# EAGLE board FuenteProtoLarga_v11 (EAGLE 6.1)
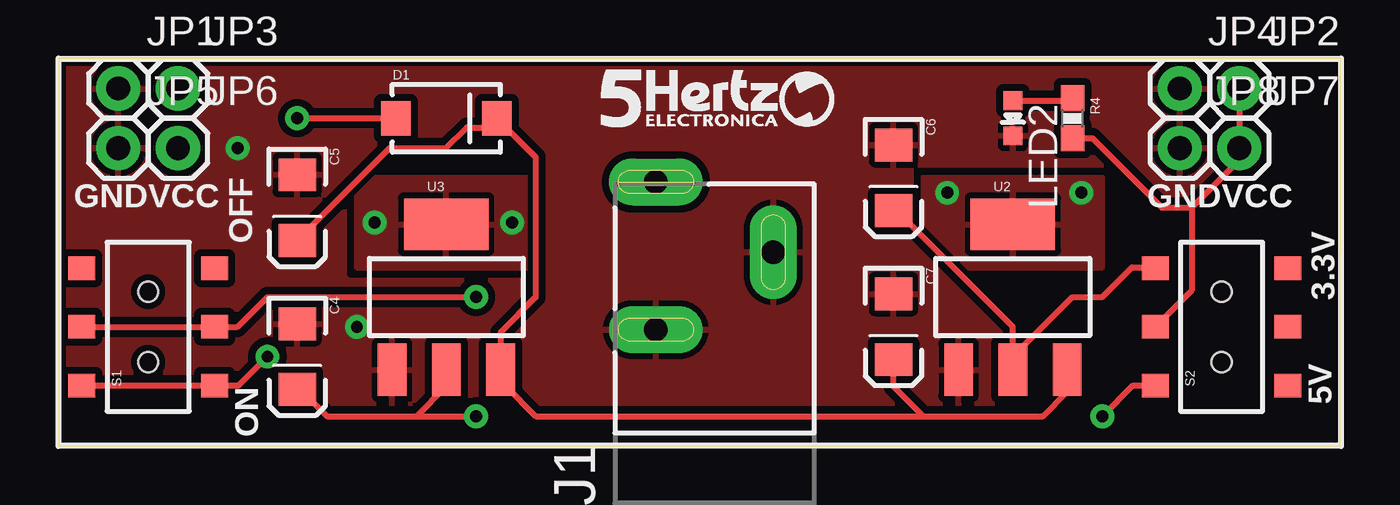
[diagram p0: board, top side]
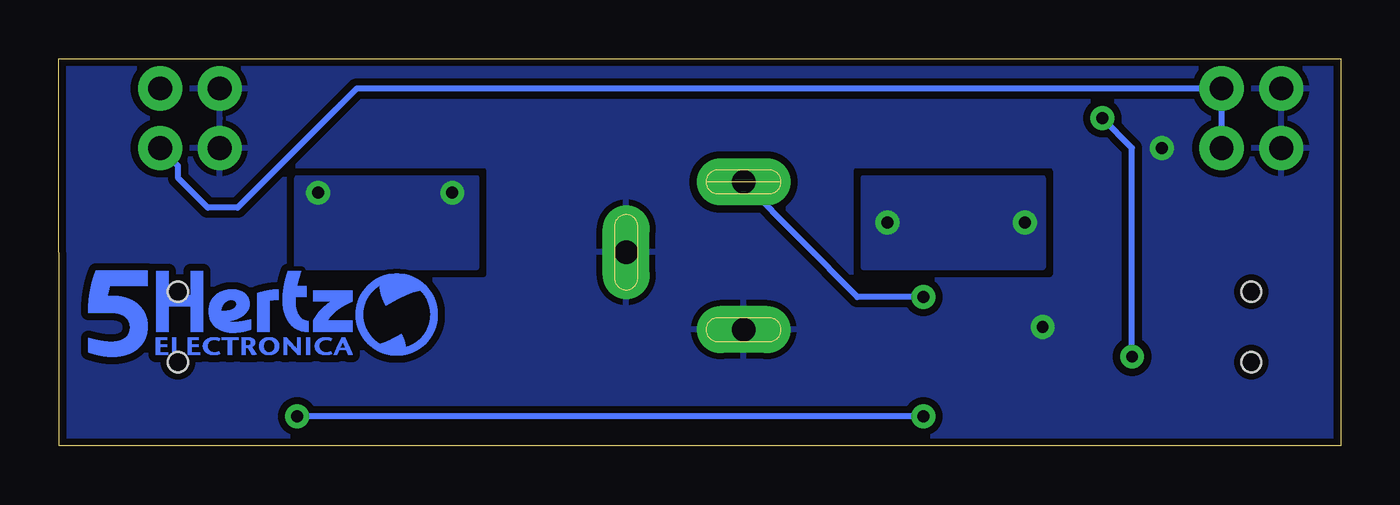
[diagram p1: board, bottom side, seen from below]

Size 54.61 x 16.51 mm. Coordinates in mm from the lower left corner, seen from the top.
Outline: 0,0 54.59,0 54.61,16.51 0,16.51 0,0
Copper layers (1*16): Top 0.035mm / dielectric 1.5mm / Bottom 0.035mm
Design rules: minimum track width 8mil, minimum drill 20mil, track to track 8mil, track to pad 8mil, pad to pad 8mil, via to via 8mil, smd to smd 8mil, copper to edge 10mil, drill to drill 8mil, minimum pad ring 12mil, minimum via ring 10mil, stop-mask expansion 4mil, vias tented up to drill 25mil, thermal gap 10mil
Net classes: 0 default: width 0.254 mm; 1 vcc: width 0.254 mm

## Footprints (pad centres in the part's own frame; a part is rotated, then mirrored left to right if it is on the bottom)
EIA3216 = smd 1.4 x 1.6: A 1.4,0; C -1.4,0
SMA-DIODE = smd 1.27 x 1.47: A -2.15,0; C 2.15,0
POWER_JACK_SLOT = drill 1 pad 2 long: GND@1 2.58,7.5; GND@2 7.58,10.8; PWR 2.58,13.8
1X01 = drill 1.016 pad 1.88: 1 0,0
LED-0603 = smd 0.8 x 0.8: A 0,-0.75; C 0,0.75
0603-RES = smd 1.1 x 1: 1 -0.85,0; 2 0.85,0
AYZ0202 = smd 1 x 1.15: 1 -2.5,2.825; 2 0,2.825; 3 2.5,2.825; 4 -2.5,-2.825; 5 0,-2.825; 6 2.5,-2.825 | hole 0.85: 1.5,0; -1.5,0
SOT223 = smd 1.219 x 2.235: 1 -2.311,-3.099; 2 0,-3.099; 3 2.311,-3.099 | smd 3.6 x 2.2: 4 0,3.099

## Placement (x,y rotation side)
C4  10uF  [EIA3216]  10.16,3.81 270 top
C5  10uF  [EIA3216]  10.16,10.16 270 top
C6  10uF  [EIA3216]  35.56,11.43 270 top
C7  10uF  [EIA3216]  35.56,5.08 270 top
D1  1N4001  [SMA-DIODE]  16.51,13.97 0 top
J1  POWER_JACKSLT  [POWER_JACK_SLOT]  22.86,-2.54 0 top
JP1  M01PTH  [1X01]  2.54,15.24 0 top
JP2  M01PTH  [1X01]  50.29,15.24 0 top
JP3  M01PTH  [1X01]  5.08,15.24 0 top
JP4  M01PTH  [1X01]  47.75,15.24 0 top
JP5  M01PTH  [1X01]  2.54,12.7 0 top
JP6  M01PTH  [1X01]  5.08,12.7 0 top
JP7  M01PTH  [1X01]  50.29,12.7 0 top
JP8  M01PTH  [1X01]  47.75,12.7 0 top
LED2  Power  [LED-0603]  40.64,13.97 180 top
LOGO1  LOGO_5HZ_H_10MM  [5HZ_LOGO_H_10MM]  23.11,13.59 0 top
LOGO2  LOGO_5HZ_H_COOPER_15MM  [5HZ_LOGO_H_COOPER_15MM]  53.34,3.81 0 bottom
R4  330  [0603-RES]  43.18,13.97 270 top
S1  On/Off  [AYZ0202]  3.81,5.08 90 top
S2  Voltage  [AYZ0202]  49.53,5.08 90 top
U2  V_REG_NCP1117SMD  [SOT223]  40.64,6.35 0 top
U3  V_REG_NCP1117SMD  [SOT223]  16.51,6.35 0 top

## Library data of the parts
C4-C7 D1 J1 JP1-JP8 R4 S1 S2 = SparkFun
LED2 = SparkFun-Nate
LOGO1 LOGO2 U2 U3 = 5hz-electronica

## Nets
3V3 [vcc]: C6.A S2.3 U2.2
5V [vcc]: C4.A S2.1 U3.2
DISIP: U3.4
DISIP2: U2.4
GND: C4.C C5.C C6.C C7.C J1.GND@1 J1.GND@2 JP1.1 JP4.1 JP5.1 JP8.1 LED2.C U2.1 U3.1
N$2: D1.A S1.1 S1.4
N$8: LED2.A R4.1
RAW: C5.A C7.A D1.C U2.3 U3.3
VCC: JP2.1 JP3.1 JP6.1 JP7.1 R4.2 S2.2
VIN: J1.PWR S1.2 S1.5

## Tracks (layer width: path | path; a pad name or v marks a point on that pad's centre or on a via)
3V3
  Top 0.254: U2.2 40.64,3.81 | 40.64,3.81 43.18,6.35 44.45,6.35 45.72,7.62 46.66,7.62 S2.3 | C6.A 35.69,10.03 40.64,5.08 40.64,3.81
5V  (via drill 0.51)
  Top 0.254: C4.A 10.29,2.41 11.43,1.27 15.24,1.27 | 15.24,1.27 16.51,2.54 U3.2 | S2.1 45.76,2.58 v44.45,1.27 | 15.24,1.27 v17.78,1.27
  Bottom 0.254: v17.78,1.27 v44.45,1.27
DISIP  (via drill 0.51)
  other vias: 13.46,9.53 19.3,9.53
  pour Top: 12.7,7.62 20.32,7.62 20.32,11.43 12.7,11.43
  pour Bottom: 12.7,11.43 12.7,7.62 20.32,7.62 20.32,11.43
DISIP2  (via drill 0.51)
  other vias: 37.85,10.79 43.56,10.79
  pour Top: 36.83,11.43 36.83,7.62 44.45,7.62 44.45,11.43
  pour Bottom: 36.83,11.43 36.83,7.62 44.45,7.62 44.45,11.43
GND  (via drill 0.51)
  other vias: 7.62,12.7 12.7,5.08
  pour Bottom (isolate 0.305, rank 2): 0,16.51 0,0 54.61,0 54.61,16.51
  pour Top (isolate 0.305, rank 2): 0,16.51 0,0 54.61,0 54.61,16.51
N$2  (via drill 0.51)
  Top 0.254: S1.1 S1.4 7.66,2.58 v8.89,3.81 | v10.16,13.97 D1.A
  Bottom 0.254: v8.89,3.81 8.89,12.7 v10.16,13.97
N$8
  Top 0.254: LED2.A 43.08,14.72 R4.1
RAW
  Top 0.254: U2.3 42.95,2.31 41.91,1.27 36.83,1.27 | C7.A 35.56,2.54 36.83,1.27 | 36.83,1.27 20.32,1.27 19.05,2.54 19.05,3.02 U3.3 18.82,4.85 20.32,6.35 20.32,12.31 D1.C 18.66,13.58 17.39,13.58 16.51,12.7 14.1,12.7 C5.A
VCC
  Top 0.254: 48.26,10.16 48.26,6.63 S2.2 | 48.26,10.16 50.16,12.06 50.16,12.57 JP7.1 JP2.1 | R4.2 44.03,13.12 46.99,10.16 48.26,10.16
  Bottom 0.254: JP6.1 JP3.1 41.91,15.24 46.99,10.16 48.26,10.16 49.53,11.43 49.53,11.94 JP7.1
VIN  (via drill 0.51)
  Top 0.254: S1.2 S1.5 7.62,5.08 8.89,6.35 v17.78,6.35
  Bottom 0.254: v17.78,6.35 20.59,6.35 J1.PWR

## Text on the board
tPlace: GND | VCC | GND | VCC | OFF | 3.3V | 5V | ON